# EAGLE board sensor_35mm (EAGLE 7.6.0)
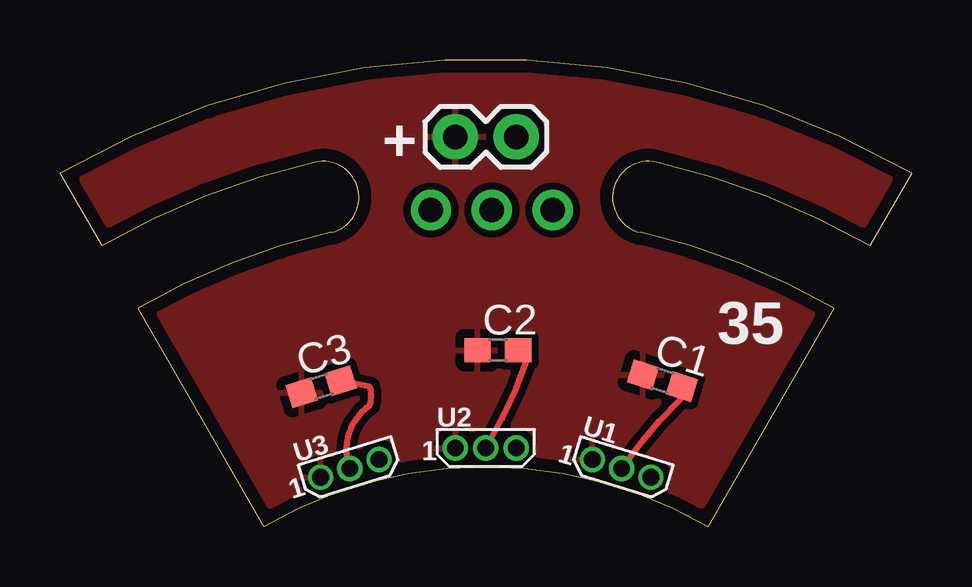
[diagram p0: board, top side]
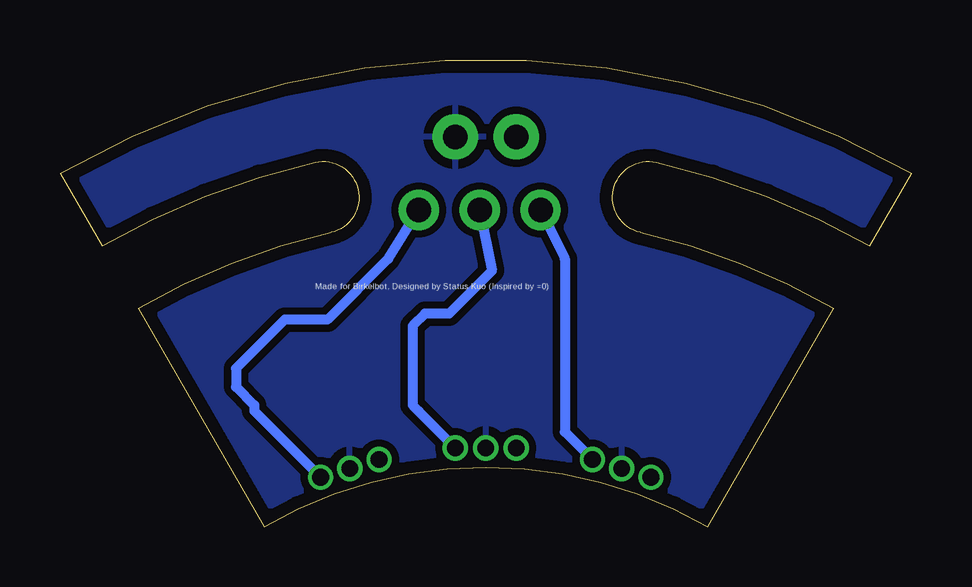
[diagram p1: board, bottom side, seen from below]

Size 35.5 x 19.44 mm. Coordinates in mm from the lower left corner, seen from the top.
Outline: 32.25,9.09 arc17 24.2,12.25 arc-180 24.87,15.18 arc-17 33.75,11.69 35.5,14.72 arc60 0,14.72 1.75,11.69 arc-17 10.63,15.18 arc-180 11.3,12.25 arc17 3.25,9.09 8.5,0 arc-60 27,0 32.25,9.09
Copper layers (1*16): Top 0.035mm / dielectric 1.5mm / Bottom 0.035mm
Design rules "charlesg_1oz *": minimum track width 10mil, minimum drill 16mil, track to track 6mil, track to pad 6mil, pad to pad 6mil, via to via 6mil, smd to smd 6mil, copper to edge 20mil, drill to drill 8mil, minimum pad ring 6mil, minimum via ring 8mil, stop-mask expansion 4mil, vias tented up to drill 0mil, thermal gap 15mil

## Footprints (pad centres in the part's own frame; a part is rotated, then mirrored left to right if it is on the bottom)
C0603 = smd 1.1 x 1: 1 -0.85,0; 2 0.85,0
1X03-CLEANBIG = drill 1.016 pad 1.676: 1 -2.54,0; 2 0,0; 3 2.54,0
1X02 = drill 1.016 pad 1.88: 1 0,0; 2 2.54,0
3PINS1,27 = drill 0.7 pad 1.016: 1 -1.27,0; 2 0,0; 3 1.27,0

## Placement (x,y rotation side)
C1  0.1uF  [C0603]  25.12,6.08 342.9 top
C2  0.1uF  [C0603]  18.26,7.35 0 top
C3  0.1uF  [C0603]  10.89,5.82 17.1 top
JP1  [1X03-CLEANBIG]  18,13.19 180 top
JP2  M02PTH  [1X02]  16.48,16.24 0 top
U1  HALL3-SIP  [3PINS1,27]  23.42,2.42 342.9 top
U2  HALL3-SIP  [3PINS1,27]  17.75,3.27 0 top
U3  HALL3-SIP  [3PINS1,27]  12.08,2.42 17.1 top

## Library data of the parts
C1-C3 = rcl
JP1 = adafruit
JP2 = SparkFun-Connectors
U1-U3 = charleses_parts_bin

## Nets
+5V: C1.1 C2.1 C3.1 JP2.1 U1.1 U2.1 U3.1
GND: C1.2 C2.2 C3.2 JP2.2 U1.2 U2.2 U3.2
N$2: JP1.1 U1.3
N$4: JP1.3 U3.3
N$7: JP1.2 U2.3

## Tracks (layer width: path | path; a pad name or v marks a point on that pad's centre or on a via)
+5V
  pour Top (isolate 0.305): -0.03,19.54 -0.03,-0.78 38.07,-0.78 38.07,19.54
GND
  Top 0.254: C3.2 12.92,5.82 arc-30 12.92,5.06 arc74 U3.2 | C2.2 19.53,7.09 arc-12 U2.2 | C1.2 25.88,5.31 arc11 U1.2
  pour Bottom (isolate 0.305): -0.03,19.54 -0.03,-0.78 38.07,-0.78 38.07,19.54
N$2
  Bottom 0.406: JP1.1 21.81,11.16 24.35,8.62 26.13,8.62 28.16,6.58 28.16,5.82 27.4,5.06 27.4,4.82 U1.3
N$4
  Bottom 0.406: JP1.3 14.45,11.16 14.45,3.94 U3.3
N$7
  Bottom 0.406: JP1.2 17.5,10.65 19.27,8.87 20.29,8.87 20.8,8.36 20.8,5.06 20.54,4.81 20.54,4.8 U2.3

## Text on the board
tPlace: + | 35
bPlace: Made for Birkelbot, Designed by Status Kuo (Inspired by =0)